# Altium PCB ConvertidorBuck.PcbDoc
Units mm, origin at the board's own origin, x right, y up, seen from the top; angles counter-clockwise.
Board outline 100 x 100 mm, 2 copper layers (Top Layer, Bottom Layer); 21 components, 6 nets, 45 pads, 3 vias.
Unrouted connection lines stored in the file: 1.
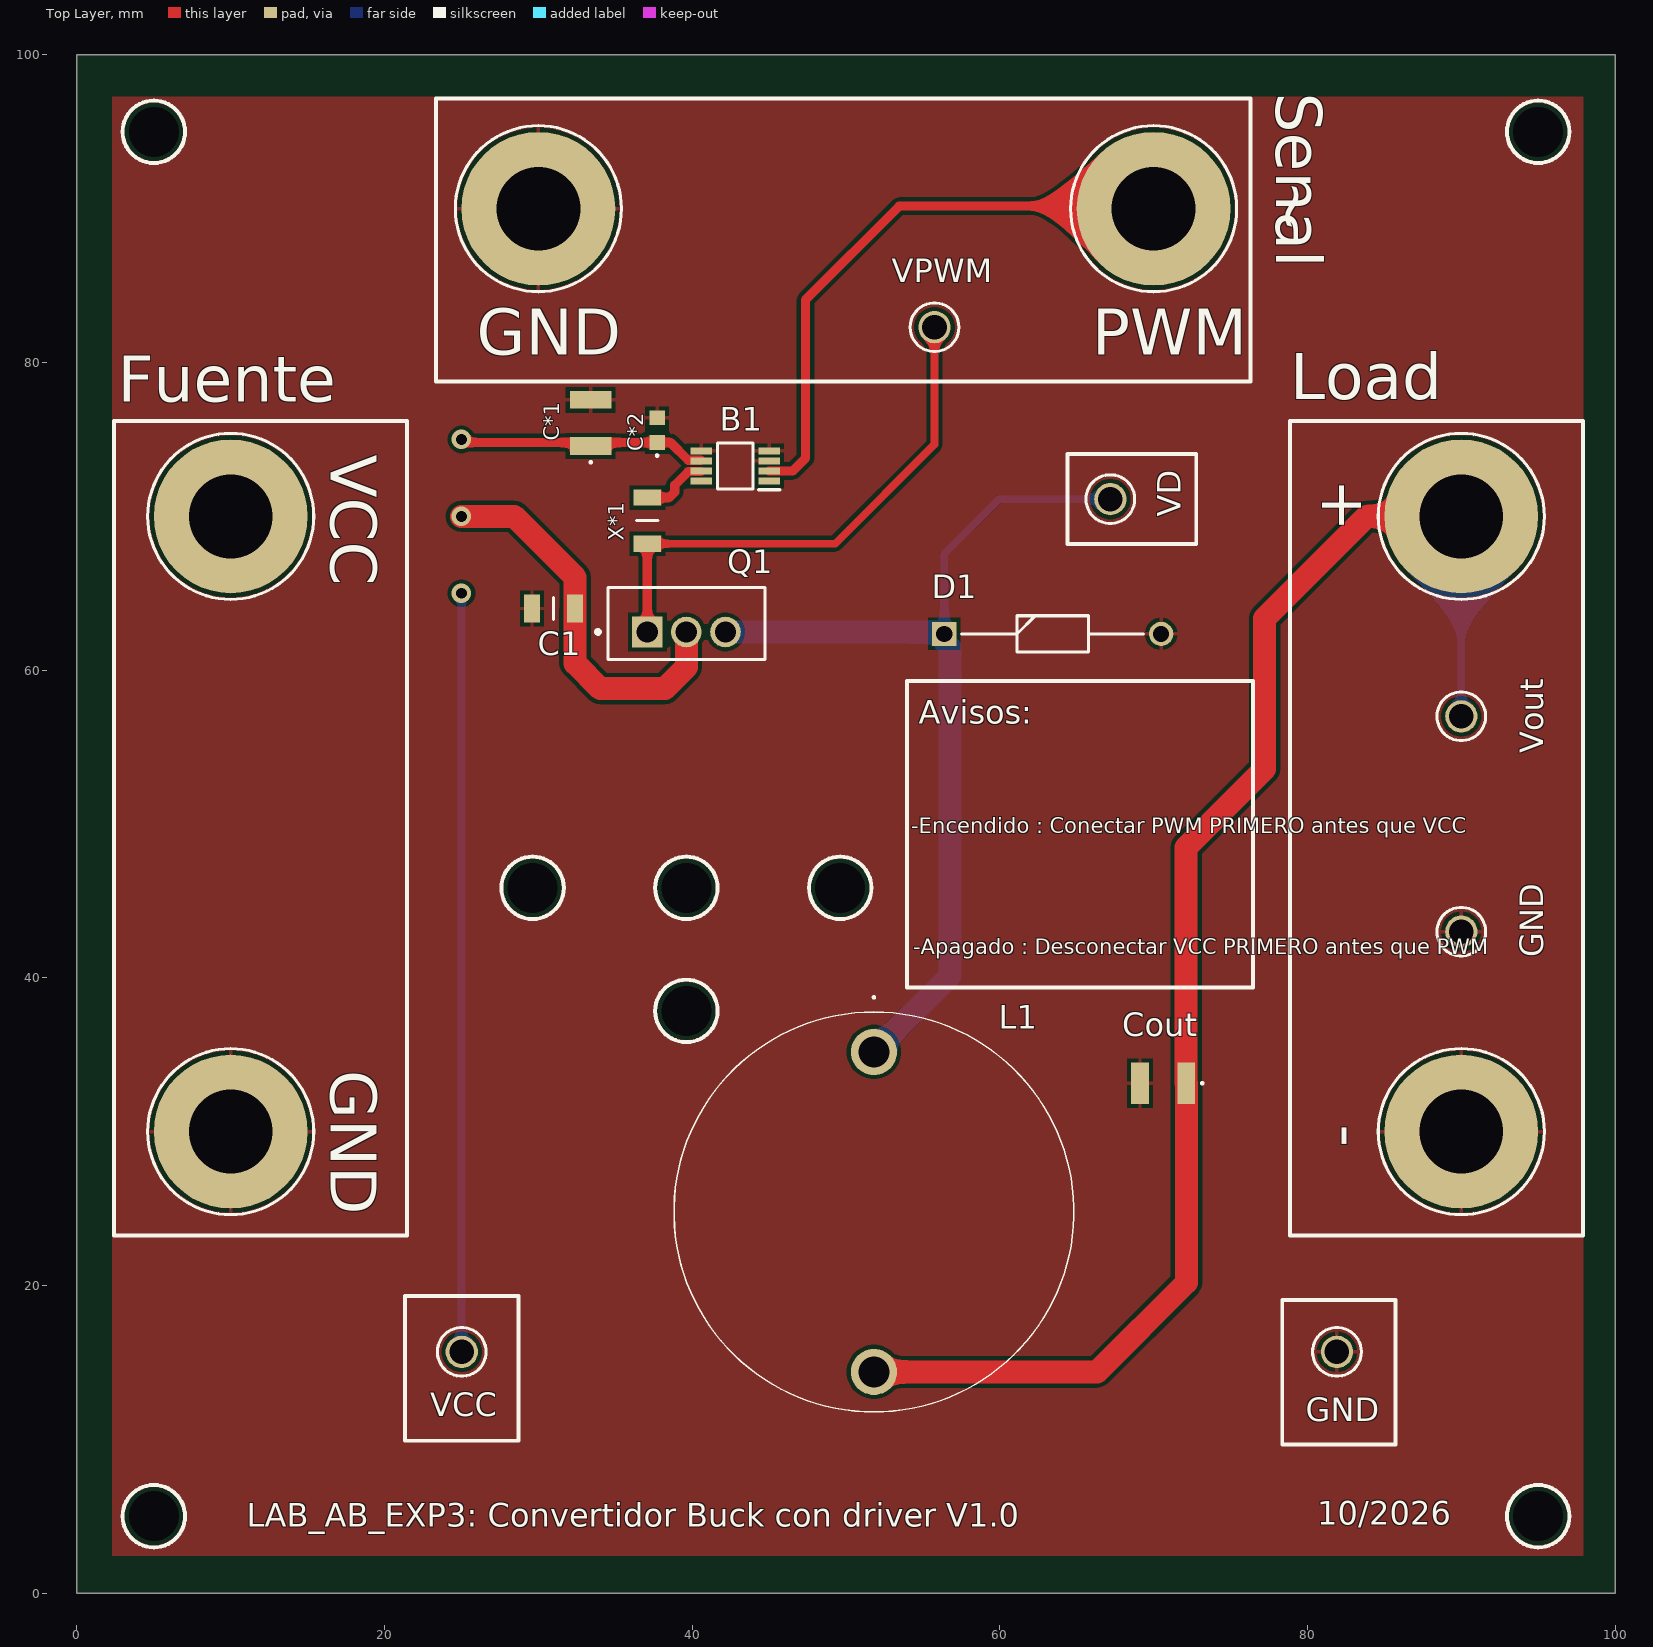
[diagram p0: Top Layer view]
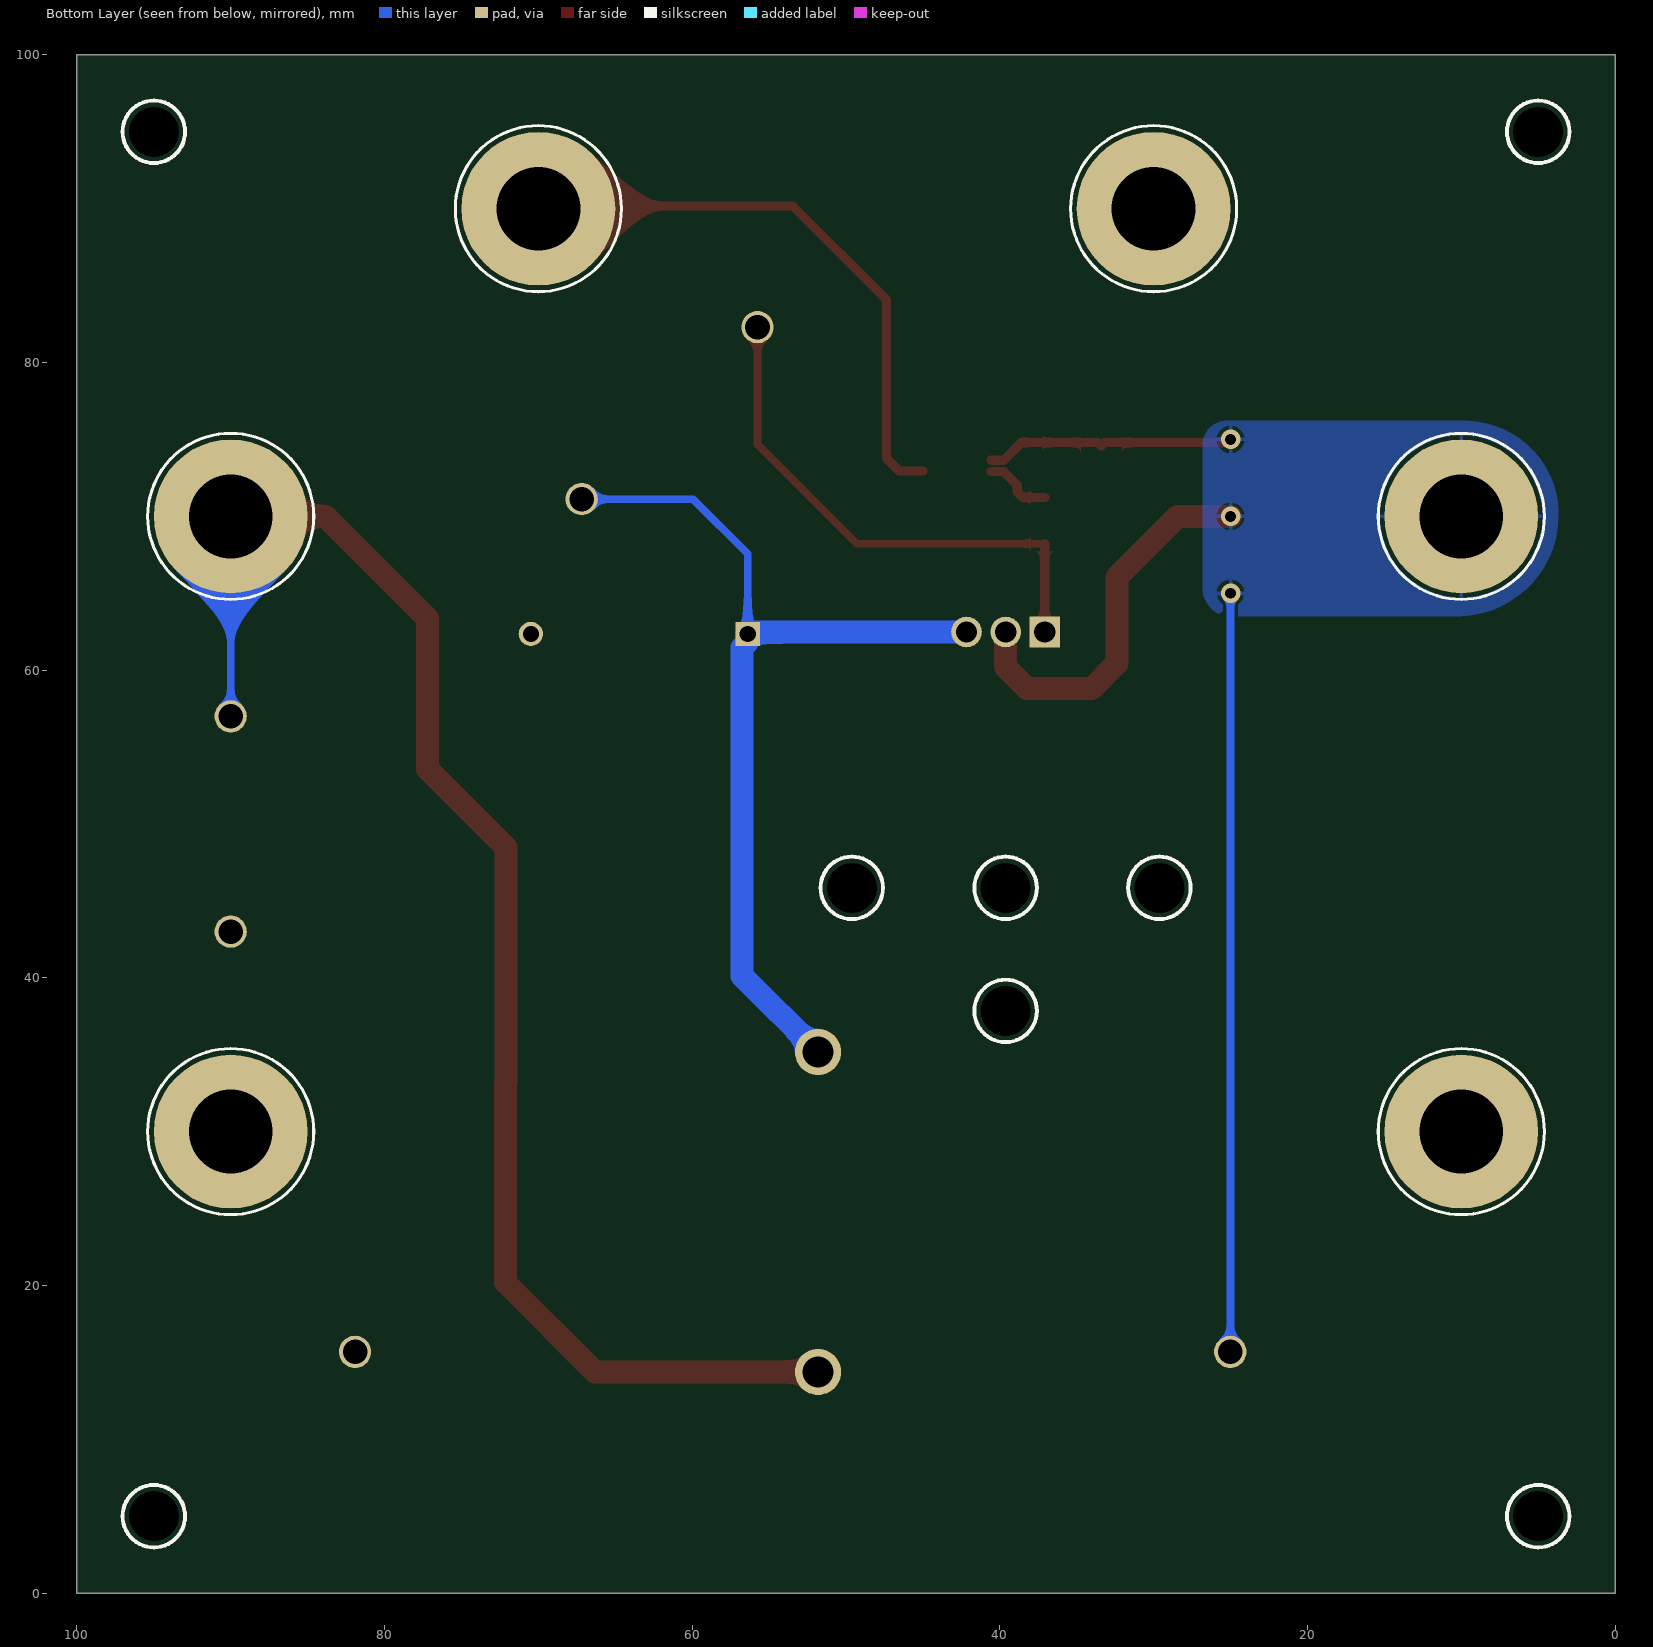
[diagram p1: Bottom Layer view, seen from below]
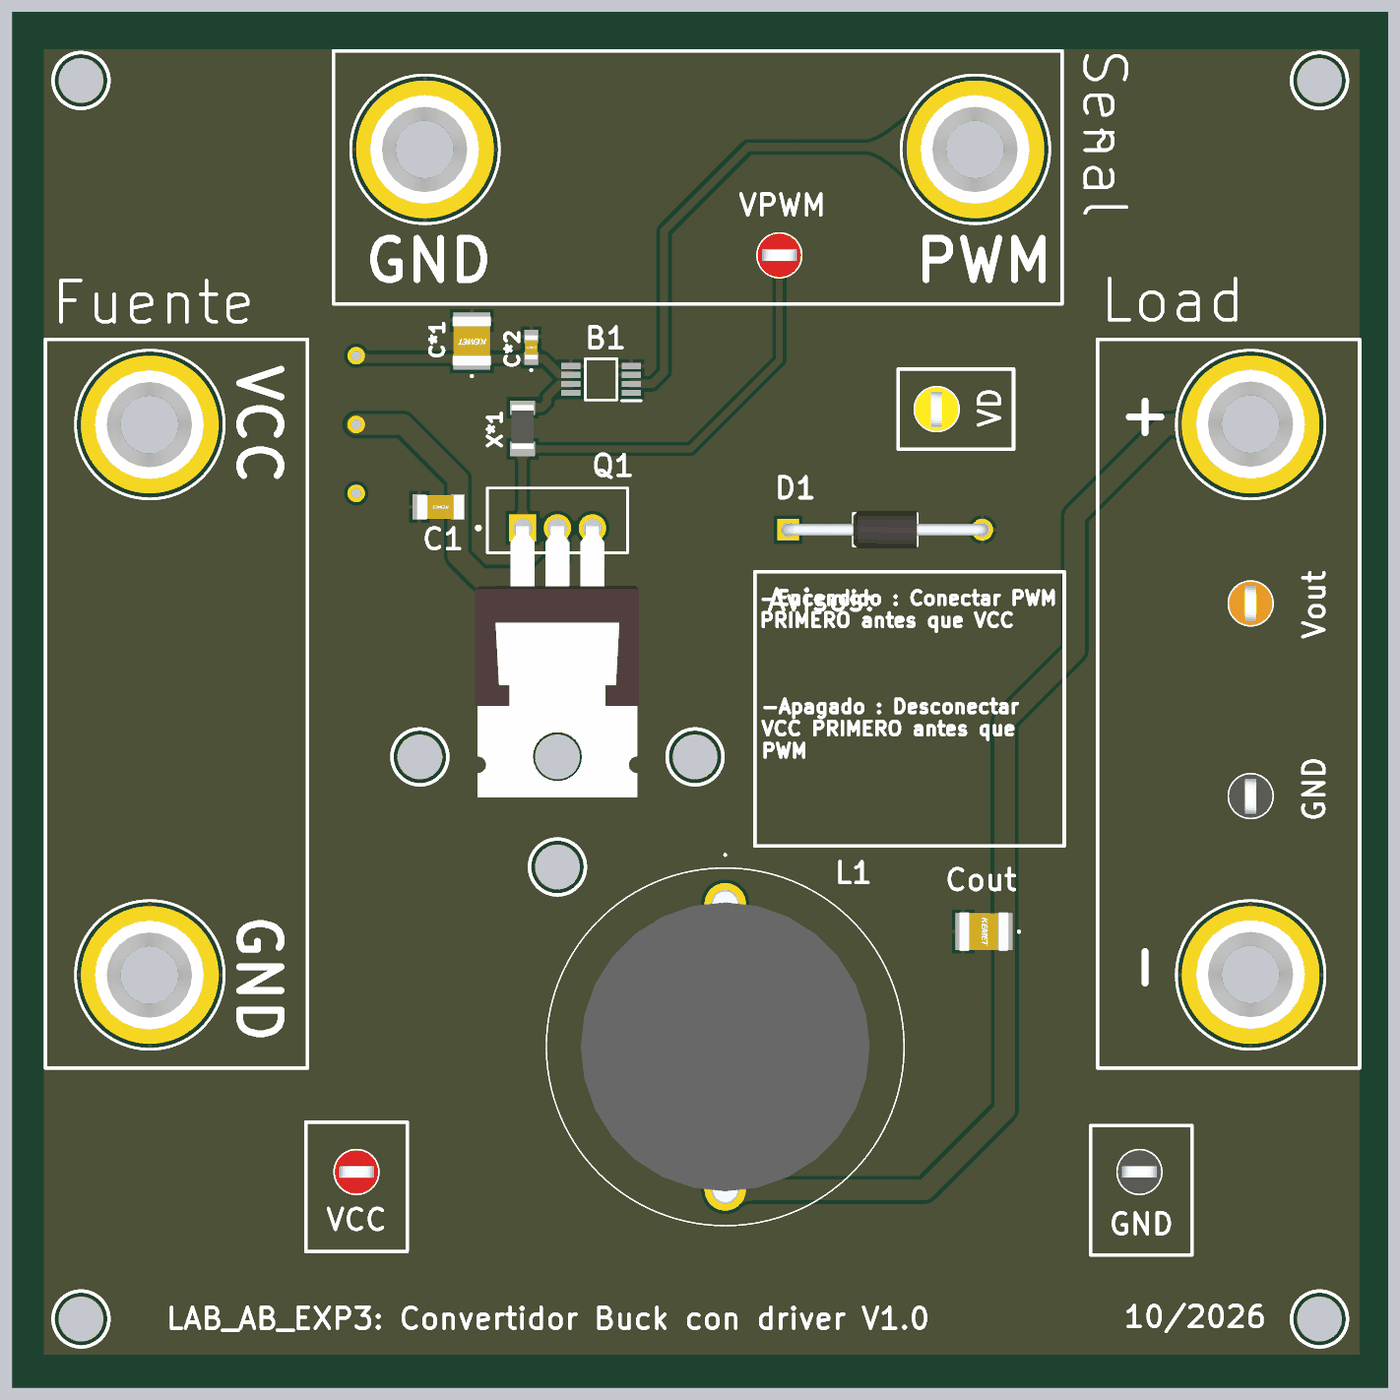
[diagram p2: 3D render of the assembled board from above, using the file's embedded part models]

## Layer stack, top to bottom
Top Solder: solder mask 0.0102, Solder Resist, Dk 3.5
Top Layer: signal copper 0.0356
Dielectric 1: dielectric 0.32, FR-4, Dk 4.8
Bottom Layer: signal copper 0.0356
Bottom Solder: solder mask 0.0102, Solder Resist, Dk 3.5

## Board outline
0,0 0,100 100,100 100,0

## Design rules (kind name [scope] priority, off if disabled: settings)
Clearance [All] p1: gap=0.254 ignorepadtopadclearanceinfootprint=FALSE
HoleSize [All] p1: absolutevalues=TRUE maxlimit=7 minlimit=0.025 maxpercent=80.000 minpercent=20.000
PolygonConnect [All] p1: connectstyle=Relief reliefconductorwidth=0.254 reliefentries=4 polygonreliefangle="90 Angle" airgapwidth=0.254
RoutingVias [All] p1: holewidth=0.711 width=1.27 viastyle="Through Hole" minholewidth=0.711 minwidth=1.27 maxholewidth=0.711 maxwidth=1.27
SolderMaskExpansion [All] p1: expansion=0 istentingtop=FALSE
SupplyNets "Schematic Supply Nets_2" [InNet('Gate')] p1: voltage=0.000
SupplyNets "Schematic Supply Nets_1" [InNet('GND')] p2: voltage=0.000
SupplyNets "Schematic Supply Nets" [InNet('VCC')] p3: voltage=0.000
Width [All] p1: maxlimit=2 minlimit=0.254 preferedwidth=0.254
29 further rules are at their usual default settings.

## Components (designator, comment, footprint, x,y, rotation, side; value= is the part's Value field where it differs from the comment)
+ "575-4" KSTN-575-4 90,70 r270 top (schematic designator TP37)
- "575-4" KSTN-575-4 90,30 r270 top (schematic designator TP38)
B1 "TC4427EUA713" SOP65P490X110-8N 42.799,73.279 r180 top
C1 "C1206C105K3RAC7800" CAPC3216X140N 30.988,64.008 r180 top (schematic designator C8)
C*1 "10uF" C1210 33.401,76.073 r90 top (schematic designator C11)
C*2 "100nF" C0603 37.719,75.603 r90 top (schematic designator C10)
Cout "C1210C106M3PACTU" C1210 70.612,33.147 r180 top (schematic designator C1)
D1 "1N5819" DIOAD1408W86L464D236 56.388,62.357 r0 top (schematic designator D2)
GND "5011" KSTN-5011_V 81.915,15.685 r0 top (schematic designator TP48)
GND "5011" KSTN-5011_V 90,43 r270 top (schematic designator TP47)
GND "575-4" KSTN-575-4 30,90 r0 top (schematic designator TP42)
GND "575-4" KSTN-575-4 10,30 r0 top locked (schematic designator TP40)
L1 "AIRD-02-222K" AIRD-02 51.816,35.179 r270 top (schematic designator L2)
PWM "575-4" KSTN-575-4 70,90 r0 top (schematic designator TP41)
Q1 "IRLZ44N" IFX-PG-TO220-3-904-1 39.624,62.484 r0 top (schematic designator Q6)
VCC "5010" KSTN-5010_V 25.019,15.685 r0 top (schematic designator TP43)
VCC "575-4" KSTN-575-4 10,70 r0 top locked (schematic designator TP39)
VD "5014" KSTN-5014_V 67.183,71.12 r90 top (schematic designator TP45)
Vout "5013" KSTN-5013_V 90,57 r270 top (schematic designator TP46)
VPWM "5010" KSTN-5010_V 55.753,82.296 r0 top (schematic designator TP44)
X*1 "10ohm" RESC3216X60N 37.084,69.723 r270 top (schematic designator X3)

## Footprints (in the part's own frame and the unit in brackets; to place one, negate y for a bottom-side part, rotate by r counter-clockwise, add the part's x,y. Pads: shape width x height; smd on the part's side, far side on the other; paste and mask are expansions set on the pad)
AIRD-02 [mm]
  round 3 hole 2: 1(0,0) 2(20.8,0)
  silkscreen extent -3.6,-13 23.4,13, body extent -0.9,-10.49 21.7,10.49, height 21.1
C0603 [mm]
  rect 0.95x1 smd: 1(-0.8,0) 2(0.8,0)
  silkscreen extent -1.7,-0.05 -1.6,0.05, body extent -0.87,-0.48 0.88,0.47, height 0.87
C1210 [mm]
  rect 1.15x2.7 smd: 1(-1.5,0) 2(1.5,0)
  silkscreen extent -2.6,-0.05 -2.5,0.05, body extent -1.8,-1.4 1.8,1.4, height 2.1
CAPC3216X140N [mm]
  rect 1.02x1.82 smd: 1(-1.4,0) 2(1.4,0)
  silkscreen extent 0,-0.7 0,0.7, body extent -1.83,-0.89 1.57,0.91, height 1.4
DIOAD1408W86L464D236 [mm]
  rect 1.575x1.575 / inner round 1.575 / far side rect 1.575x1.575 hole 1.05: 1(0,0)
  round 1.575 hole 1.05: 2(14.1,0)
  silkscreen extent 1.14,-1.18 12.96,1.18, body extent -0.43,-1.35 14.51,1.35, height 2.72
IFX-PG-TO220-3-904-1 [mm] "TO,flange mount,2.54 mm pitch, 3 pin, 10.16 mm L X 4.57 mm W X 20.56 mm H body"
  rect 1.99x1.99 hole 1.39 paste-2539.97 mask+0: 1(-2.54,0)
  round 1.99 hole 1.39 paste-2539.97 mask+0: 2(0,0) 3(2.54,0)
  silkscreen extent -5.87,-1.8 5.1,2.9, body extent -5.94,-19.59 5.94,0.25, height 4.41
KSTN-575-4 [mm] "Banana Jack, Non-Insulated, Dia 7.92mm"
  round 10 hole 5.45: 1(0,0)
  silkscreen extent -5.4,-5.4 5.4,5.4, body extent -3.98,-3.96 3.92,3.94, height 2.36
KSTN-5010_V [mm] "Test Point, Dia 3.17mm"
  round 2.1 hole 1.6: 1(0,0)
  silkscreen extent -1.59,-1.58 1.59,1.58, body extent -1.59,-1.59 1.59,1.59, height 8.13
KSTN-5011_V [mm] "Test Point, Dia 3.17mm"
  round 2.1 hole 1.6: 1(0,0)
  silkscreen extent -1.59,-1.58 1.59,1.58, body extent -1.59,-1.59 1.59,1.59, height 8.13
KSTN-5013_V [mm] "Test Point, Dia 3.17mm"
  round 2.1 hole 1.6: 1(0,0)
  silkscreen extent -1.58,-1.59 1.58,1.59, body extent -1.59,-1.59 1.59,1.59, height 8.13
KSTN-5014_V [mm] "Test Point, Dia 3.17mm"
  round 2.1 hole 1.6: 1(0,0)
  silkscreen extent -1.58,-1.59 1.58,1.59, body extent -1.59,-1.59 1.59,1.59, height 8.13
RESC3216X60N [mm]
  rect 1.05x1.8 smd: 1(-1.5,0) 2(1.5,0)
  silkscreen extent 0,-0.7 0,0.7, body extent -1.7,-0.8 1.5,0.8, height 0.55
SOP65P490X110-8N [mm]
  rect 1.4x0.45 smd: 1(-2.2,0.975) 2(-2.2,0.325) 3(-2.2,-0.325) 4(-2.2,-0.975) 5(2.2,-0.975) 6(2.2,-0.325) 7(2.2,0.325) 8(2.2,0.975)
  silkscreen extent -2.9,-1.5 1.15,1.55

## Part data
+ - GND GND PWM VCC: library part CMP-2000-05649-1, "Banana Jack, Non-Insulated, 1-Pin THD, RoHS, Bulk", Color=-, Manufacturer=Keystone-Electronics, Package Description="1-Pin Through Hole Device, Dia 7.92 mm", Package Version="Rev. B, 11/1994", Body Material=-, Category=Connectors,Interconnects, Contact Finish=Nickel, Contact Material=Brass, Datasheet URL=http://www.keyelco.com/product-pdf.cfm?p=2379, Datasheet Version="Rev. B, 11/1994", Family=BananaandTipConnectors-Jacks,Plugs, Features=-, Gender=Female, Insulation=Non-Insulated, Manufacturer URL=http://www.keyelco.com/, Mounting Technology=ThroughHole, Mounting Type=ThroughHole, Operating Temperature=-, Package Reference=575-4, Package URL=http://www.keyelco.com/product-pdf.cfm?p=2379, Packaging=Bulk, Plug/Mating Plug Diameter=StandardBanana, Series=-, Termination=Solder, Type=BananaJack, Wire Gauge=-
B1: "TC4427A Series 1.5 A 18 Vmax 7 Ohm Dual Non Inverting MOSFET Driver - MSOP-8", Manufacturer_Name=Microchip, Mouser Part Number=579-TC4427EUA713, Datasheet Link=https://ww1.microchip.com/downloads/en/DeviceDoc/20001422G.pdf, Geometry.Height=1.1mm, Manufacturer_Part_Number=TC4427EUA713, Mouser Price/Stock=https://www.mouser.co.uk/ProductDetail/Microchip-Technology/TC4427EUA713?qs=6pREnGtJ7gG%2Fg%252Bua4Jcb3A%3D%3D
C1: "Multilayer Ceramic Capacitors MLCC - SMD/SMT 25V 1uF X7R 1206 10%", Manufacturer_Name="Yageo Group", Mouser Part Number=80-C1206C105K3R7800, Datasheet Link=https://connect.kemet.com:7667/gateway/IntelliData-ComponentDocumentation/1.0/download/specsheet/C1206C105K3RACTU, Geometry.Height=1.4mm, Manufacturer_Part_Number=C1206C105K3RAC7800, Mouser Price/Stock=https://www.mouser.co.uk/ProductDetail/KEMET/C1206C105K3RAC7800?qs=9Bh1%2FLvCqWR5qBTiXKKjKA%3D%3D
C*1: library part C1210C106M3PACTU, "Capacitor", Manufacturer_Name="Yageo Group", Mouser Part Number=80-C1210C106M3P, Datasheet Link=https://www.yageogroup.com/content/datasheet/asset/file/KEM_C1006_X5R_SMD, Manufacturer_Part_Number=C1210C106M3PACTU, Mouser Price/Stock=https://www.mouser.com/Search/Refine.aspx?Keyword=80-C1210C106M3P
C*2: library part C0603X104M3RACTU, "Capacitor", Manufacturer_Name="Yageo Group", Mouser Part Number=80-C0603X104M3R, Arrow Part Number=C0603X104M3RACTU, Arrow Price/Stock=https://www.arrow.com/en/products/c0603x104m3ractu/kemet-corporation, Datasheet Link=https://www.yageogroup.com/content/datasheet/asset/file/KEM_C1013_X7R_FT-CAP_SMD, Height=0.87mm, Manufacturer_Part_Number=C0603X104M3RACTU, Mouser Price/Stock=https://www.mouser.co.uk/ProductDetail/KEMET/C0603X104M3RACTU?qs=p6yRp5s%252B%2FXSQKNqxiIj6xg%3D%3D
Cout: "Capacitor", Manufacturer_Name="Yageo Group", Mouser Part Number=80-C1210C106M3P, Datasheet Link=https://www.yageogroup.com/content/datasheet/asset/file/KEM_C1006_X5R_SMD, Manufacturer_Part_Number=C1210C106M3PACTU, Mouser Price/Stock=https://www.mouser.com/Search/Refine.aspx?Keyword=80-C1210C106M3P
D1: "Schottky Barrier Rectifier Diodes", Manufacturer_Name=Diotec, Mouser Part Number=637-1N5819, Datasheet Link=https://www.diodes.com/assets/Datasheets/ds23001.pdf, Manufacturer_Part_Number=1N5819, Mouser Price/Stock=https://www.mouser.co.uk/ProductDetail/Diotec-Semiconductor/1N5819?qs=OlC7AqGiEDlzWAEqP18zhw%3D%3D
GND GND: library part CMP-1672-00003-4, "Test Point, Black, Through Hole, RoHS, Bulk", Colour=Black, Manufacturer=Keystone, Package Quantity=100, ComponentLink1Description="Manufacturer URL", ComponentLink1URL=http://www.keyelco.com/, ComponentLink2Description=Datasheet, ComponentLink2URL=http://www.keyelco.com/product-pdf.cfm?p=1320, Contact Material=Bronze, Contact Plating=Silver, DatasheetVersion="Rev. F, 12/2013", Height="8.12 mm", Mount="Through Hole", Mounting Technology="Through Hole", PackageDescription="1-Pin Through Hole Device, Dia 3.17 mm", PackageReference=5011, Packaging=Bulk, Pins=1, REACH SVHC="No SVHC", RoHSCompliant=true
L1: "Inductor", Manufacturer_Name=ABRACON, Mouser Part Number=815-AIRD-02-222K, Arrow Part Number=AIRD-02-222K, Arrow Price/Stock=https://www.arrow.com/en/products/aird-02-222k/abracon, Datasheet Link=https://abracon.com/Magnetics/radial/AIRD02.pdf, Height=21mm, Manufacturer_Part_Number=AIRD-02-222K, Mouser Price/Stock=https://www.mouser.co.uk/ProductDetail/ABRACON/AIRD-02-222K?qs=qV1JnYL3zOzbPmurb06pXg%3D%3D
Q1: "OptiMOS 3 Power-Transistor, VDS 100V", Manufacturer="Infineon Technologies", Manufacturer Order Number=IRLZ44N, PackageReference=PG-TO220-3-904
VCC VPWM: library part CMP-1672-00002-4, "Test Point, Red, Through Hole, RoHS, Bulk", Colour=Red, Manufacturer=Keystone, Package Quantity=100, ComponentLink1Description="Manufacturer URL", ComponentLink1URL=http://www.keyelco.com/, ComponentLink2Description=Datasheet, ComponentLink2URL=http://www.keyelco.com/product-pdf.cfm?p=1319, Contact Material=Bronze, Contact Plating=Silver, DatasheetVersion="Rev. F, 12/2013", Height="8.12 mm", Mount="Through Hole", Mounting Technology="Through Hole", PackageDescription="1-Pin Through Hole Device, Dia 3.17 mm", PackageReference=5010, Packaging=Bulk, Pins=1, REACH SVHC="No SVHC", RoHSCompliant=true
VD: library part CMP-1672-00006-4, "Test Point, Yellow, Through Hole, RoHS, Bulk", Colour=Yellow, Manufacturer=Keystone, Package Quantity=100, ComponentLink1Description="Manufacturer URL", ComponentLink1URL=http://www.keyelco.com/, ComponentLink2Description=Datasheet, ComponentLink2URL=http://www.keyelco.com/product-pdf.cfm?p=1323, Contact Material=Bronze, Contact Plating=Silver, DatasheetVersion="Rev. F, 12/2013", Height="8.12 mm", Mount="Through Hole", Mounting Technology="Through Hole", PackageDescription="1-Pin Through Hole Device, Dia 3.17 mm", PackageReference=5014, Packaging=Bulk, REACH SVHC="No SVHC", RoHSCompliant=true
Vout: library part CMP-1672-00005-4, "Test Point, Orange, Through Hole, RoHS, Bulk", Colour=Orange, Manufacturer=Keystone, Package Quantity=100, ComponentLink1Description="Manufacturer URL", ComponentLink1URL=http://www.keyelco.com/, ComponentLink2Description=Datasheet, ComponentLink2URL=http://www.keyelco.com/product-pdf.cfm?p=1322, Contact Material=Bronze, Contact Plating=Silver, DatasheetVersion="Rev. F, 12/2013", Height="8.12 mm", Mount="Through Hole", Mounting Technology="Through Hole", PackageDescription="1-Pin Through Hole Device, Dia 3.17 mm", PackageReference=5013, Packaging=Bulk, REACH SVHC="No SVHC", RoHSCompliant=True
X*1: library part CRCW120610R0FKTC, "Standard Thick Film Chip Resistors value 10R0 ohm.", Manufacturer_Name=Vishay, Geometry.Height=0.6mm, Manufacturer_Part_Number=CRCW120610R0FKTC

## Free pads (board coordinates)
  round 0 hole 3.25: 9(5,5) 9(5,95) 9(29.624,45.847) 9(39.624,37.847) 9(39.624,45.847) 9(49.624,45.847) 9(95,5) 9(95,95)

## Via types
v1: diameter 1.27, hole 0.711, Top Layer to Bottom Layer, 3 vias

## Nets (pads, with @x,y where several pads share a name; then routed paths per layer and width w, separated by ;. In a path a pad name is that pad's centre, name@x,y a point inside that pad or via, vN(x,y) a via of type N, cw(c..) or ccw(c..) an arc to the next point about the centre after c; other vN are vias at no path point)
Diode: D1.1 L1.1 Q1.3 VD.1 | length 61.1
  Bottom Layer w0.5: D1.1 56.388,67.564 59.944,71.12 62.611,71.12 VD.1
  Bottom Layer w1.5: Q1.3 D1.1@56.388,62.484 ; L1.1 56.769,40.132 56.769,61.462 56.426,61.805 56.426,62.319 D1.1
Gate: B1.2 PWM.1 Q1.1 VPWM.1 X*1.2 | length 72.9
  Top Layer w0.5: X*1.2 49.3,68.223 55.753,74.676 VPWM.1
  Top Layer w0.6: Q1.1 X*1.2 ; B1.2 46.538,72.954 47.371,73.787 47.371,84.074 53.467,90.17 69.83,90.17 PWM.1
GND: -.1 B1.3 B1.4 B1.5 C1.2 C*1.2 C*2.2 Cout.2 D1.2 GND.1
NetB1_7: B1.7 X*1.1 | length 4.5
  Top Layer w0.254: B1.7@40.555,72.91 B1.7
  Top Layer w0.6: X*1.1 38.506,71.223 38.862,71.579 38.862,72.031 39.741,72.91 B1.7@40.555,72.91
Out: +.1 Cout.1 L1.2 Vout.1 | length 96.8
  Top Layer w1.5: L1.2 66.322,14.379 72.136,20.193 72.136,33.123 Cout.1 72.112,48.485 77.216,53.589 77.216,63.373 83.843,70 +.1 ; +.1@89.133,69.067 +.1@89.281,69.215
  Bottom Layer w0.5: Vout.1 +.1
VCC: B1.6 C1.1 C*1.1 C*2.1 Q1.2 VCC.1 | length 91.1
  Top Layer w0.254: C*1.1 C*1.1@33.631,74.803 ; B1.6@40.555,73.648 B1.6
  Top Layer w0.6: v1(25,75) 25.181,75 25.378,74.803 33.171,74.803 C*1.1 ; C*1.1@33.631,74.803 C*2.1 38.586,74.803 39.741,73.648 B1.6@40.555,73.648
  Top Layer w1.5: v1(25,70) 28.425,70 32.388,66.037 C1.1 ; C1.1@32.385,64.008 32.385,60.452 34.036,58.801 38.227,58.801 39.624,60.198 Q1.2
  Bottom Layer w0.254: v1(25,65) v1@25.01,64.99 ; VCC.1@25.01,15.694 VCC.1@25.019,15.685
  Bottom Layer w0.5: VCC.1@25.01,15.694 25.01,19.694 v1@25.01,64.99
pads on no net: B1.1 B1.8

## Polygon pours and split planes (outlines as drawn)
VCC on Bottom Layer "VCC_L02_P000" (solid, pour order 0): 3.683,70.104 ccw(c10.287,70.104) 10.287,63.5 25.019,63.5 ccw(c25.019,65.278) 26.797,65.278 26.797,74.676 ccw(c25.273,74.676) 25.273,76.2 9.779,76.2 ccw(c9.779,70.104)
GND on Top Layer "GND_L01_P001" (solid, pour order 1): 2.286,97.282 97.917,97.282 97.917,2.413 2.286,2.413

## Silkscreen, mask and mechanical layers (free items; w line width, h text height)
Top Overlay:
  circle w0.254: c49.624,45.847 r2.031
  circle w0.254: c39.624,45.847 r2.031
  circle w0.254: c29.624,45.847 r2.031
  circle w0.254: c39.624,37.847 r2.031
  circle w0.254: c95,5 r2.031
  circle w0.254: c95,95 r2.031
  circle w0.254: c5,95 r2.031
  circle w0.254: c5,5 r2.031
  lines w0.254: 2.413,23.241 21.463,23.241 21.463,76.2 2.413,76.2 2.413,23.241 ; 21.336,9.906 28.702,9.906 28.702,19.304 21.336,19.304 21.336,9.906 ; 23.346,78.775 23.346,97.155 76.305,97.155 76.305,78.775 23.346,78.775 ; 53.975,39.37 76.454,39.37 76.454,59.309 53.975,59.309 53.975,39.37 ; 64.389,68.199 72.771,68.199 72.771,74.041 64.389,74.041 64.389,68.199 ; 78.359,9.652 85.725,9.652 85.725,19.05 78.359,19.05 78.359,9.652 ; 78.867,23.241 97.917,23.241 97.917,76.2 78.867,76.2 78.867,23.241
  text "Senal" at 77.962,97.536 h3 r270
  text "~" at 78.149,92.098 h3 r256.5
  text "Load" at 78.867,77.597 h3
  text "Fuente" at 2.667,77.454 h3
  text "Avisos:" at 54.737,56.515 h1.52
  text "-Encendido : Conectar PWM PRIMERO antes que VCC" at 54.229,49.403 h1
  text "-Apagado : Desconectar VCC PRIMERO antes que PWM" at 54.356,41.529 h1
  text "10/2026" at 80.645,4.445 h1.52
  text "LAB_AB_EXP3: Convertidor Buck con driver V1.0" at 11.049,4.318 h1.52
Bottom Overlay:
  circle w0.254: c49.624,45.847 r2.031
  circle w0.254: c39.624,45.847 r2.031
  circle w0.254: c39.624,37.847 r2.031
  circle w0.254: c29.624,45.847 r2.031
  circle w0.254: c95,5 r2.031
  circle w0.254: c95,95 r2.031
  circle w0.254: c5,95 r2.031
  circle w0.254: c5,5 r2.031